# Altium PCB M2FS FLS Data Formatter 8_14_2012 centroid.PcbDoc (part 2 of 3)
Units mil, origin at the board's own origin, x right, y up, seen from the top; angles counter-clockwise.
Board outline 3350 x 3370 mil, 8 copper layers (Top Layer, Internal Plane 1, Mid-Layer 1, Mid-Layer 2, MidLayer3, Mid-Layer 4, Internal Plane 2, Bottom Layer); 141 components, 138 nets, 814 pads, 61 vias.
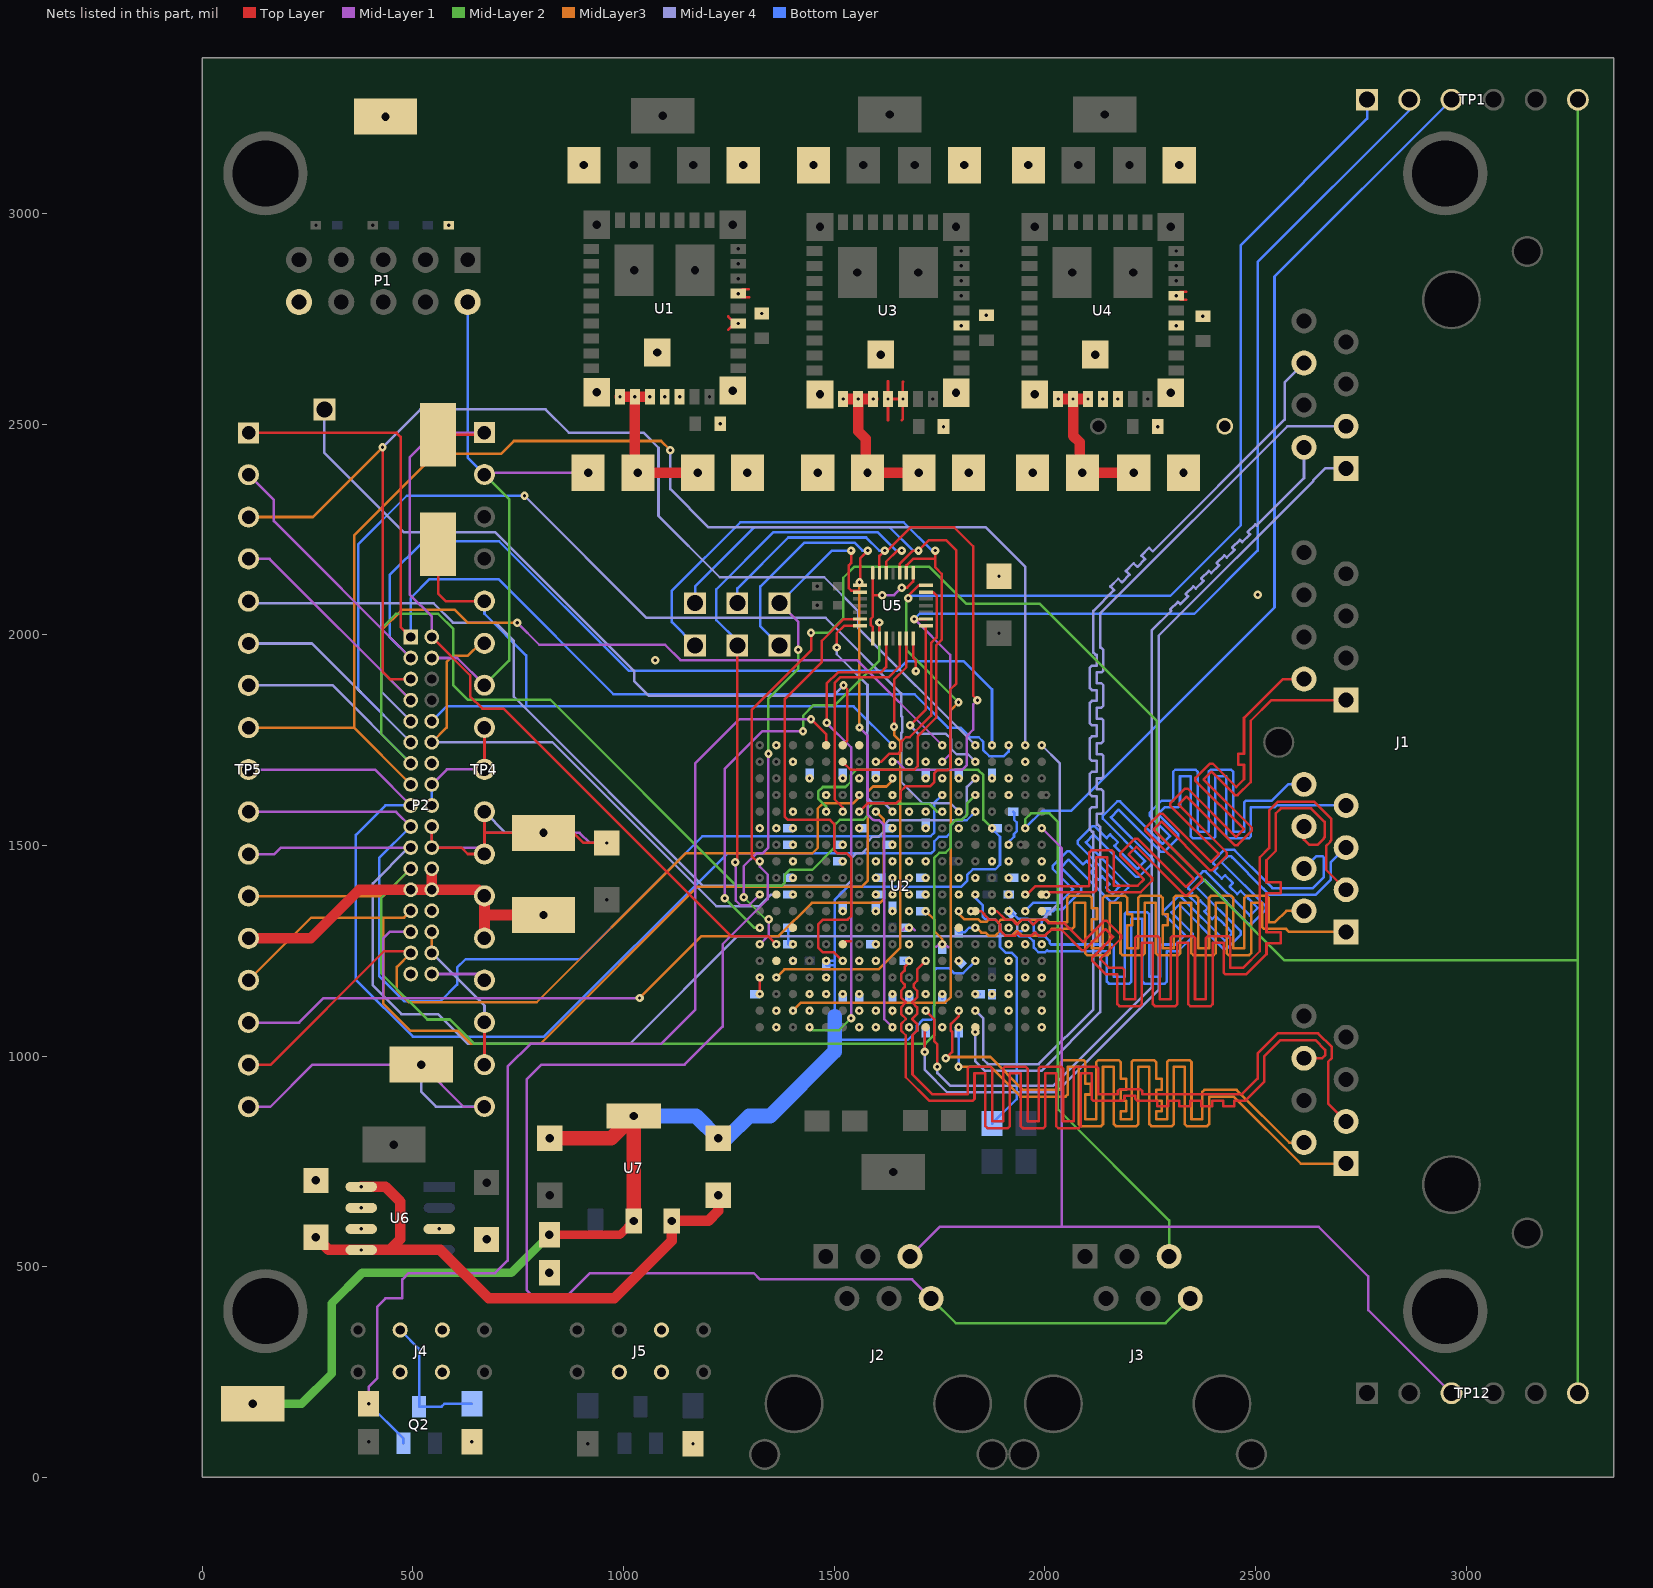
[diagram p8: the nets of this part, all layers, seen from the top]

## Via types
v1: diameter 20, hole 8, Top Layer to Bottom Layer, 60 vias
v2: diameter 20, hole 8, Top Layer to Bottom Layer, tented bottom, 1 vias

## Nets (pads, with @x,y where several pads share a name; then routed paths per layer and width w, separated by ;. In a path a pad name is that pad's centre, name@x,y a point inside that pad or via, vN(x,y) a via of type N, cw(c..) or ccw(c..) an arc to the next point about the centre after c; other vN are vias at no path point) (continued)
5V0: "TEST POINT 10." C7.1 C8.1 C9.1 C10.1 C11.1 C12.1 C59.1 C61.1 J4.2 J5.2 P2.24 P2.25 P2.26 R30.1 R32.1 TP4.12 TP4.13 TP5.13 U1.30 U1.31 U1.32 U3.30 U3.31 U3.32 U4.30 U4.31 U4.32 U6.5 U6.8 U7.1 | length 3446.2
  Top Layer w25: TP5.13@110,1279.61 257.61,1279.61 373,1395 P2.25@495,1395 P2.26@545,1395 ; C61.1@270,570 300,540 U6.5@377.48,540 565,540 680,425 977.55,425 1114.55,562 U7.1@1114.55,608.83 1200.83,608.83 1225,633 C59.1@1225,670 ; U6.8@377.48,690 435,690 470,655 470,565 451,546 ; P2.24@545,1445 P2.26@545,1395 ; TP4.13@670,1280 670,1338 ; 810,1335 673,1335 670,1338 ; U1.30@991.54,2564.8 U1.31@1026.97,2564.8 ; U1.32@1062.4,2564.8 U1.31@1026.97,2564.8 ; C7.1@1175.94,2385 C10.1@1034.06,2385 1026.97,2392.09 U1.31@1026.97,2564.8 ; U3.30@1521.42,2559.69 U3.31@1556.85,2559.69 ; U3.32@1592.28,2559.69 U3.31@1556.85,2559.69 ; C8.1@1700.94,2385 C11.1@1579.06,2385 1575,2389.06 1575,2465 1556.85,2483.15 U3.31@1556.85,2559.69 ; U4.30@2031.42,2559.69 U4.31@2066.85,2559.69 ; U4.32@2102.28,2559.69 U4.31@2066.85,2559.69 ; C9.1@2210.94,2385 C12.1@2089.06,2385 2082.7,2391.36 2082.7,2457 2066.85,2472.85 U4.31@2066.85,2559.69 ; P2.26@545,1395 655.39,1395 TP4.12@670,1380.39 670,1338
  Bottom Layer w25: R32.1@1163.31,81.69 R32.1@1165,80
AGND: "TEST POINT 14.1" C26.2 C48.2 C59.2 C60.2 pad.P5 R27.1 U2.E5 U2.F15 U2.P14 U7.2 | length 4288.6
  Top Layer w20: R27.1@824,576 991.17,576 U7.2@1024,608.83
  Top Layer w35: C60.2@825,805 971,805 U7.2@1024,858 U7.2@1024,608.83
  Mid-Layer 2 w6: U2.E5@1480.83,1580.48 1480.83,1592.98 1461.83,1611.98 1461.83,1627.72 1472.96,1638.85 1526.7,1638.85 1539.2,1651.35 1539.2,1666.4 1552.39,1679.59 1567.44,1679.59 1567.85,1680 1590.67,1680 1591.08,1679.59 1841.67,1679.59 1854.17,1667.09 1854.17,1561.48 U2.F15@1874.54,1541.11
  Mid-Layer 2 w20: 120,175 236,175 307,246 307,413 380,486 734,486 R27.1@824,576
  Bottom Layer w6: 1501.2,1044 1506.2,1039 1674.67,1039 1696.53,1060.86 1696.53,1072.07 1711,1086.54 1730.78,1086.54 1736.06,1091.81 1736.06,1119.18 1737.43,1120.55 1737.43,1203.01 1742.7,1208.28 1773.17,1208.28 1784.22,1197.22 1806.24,1197.22 U2.P14@1835.17,1226.15 ; 1501.2,1095 1501.2,1215.04 ; U2.F15@1874.54,1541.11 1874.54,1539.74 1893.54,1520.74 1893.54,1454.72 1882.18,1443.37 1828.89,1443.37 1816.32,1430.8 1816.32,1416.88 1801.92,1402.47 1801.76,1402.63 1532.72,1402.63 1501.2,1371.12 1501.2,1226 ; 1501.2,1215.04 1501.2,1226 ; 1501.2,1215.04 1500.72,1215.52 C48.2@1480.83,1215.52 pad.P5@1480.83,1226.15 1501.06,1226.15 1501.2,1226
  Bottom Layer w35: U7.2@1024,858 1172,858 C59.2@1225,805 1245,805 1298,858 1348,858 1501.2,1011.2 1501.2,1044 1501.2,1095
CAM_CLKA: "TEST POINT 8.CAM_CLK_A" P2.2 TP4.1 U2.N2 | length 1910.6
  Top Layer w6: P2.2@545,1995 636,1904 636,1854 665,1825 715,1825 1255,1285 1343.24,1285 U2.N2@1362.72,1265.52 ; 560,2475 665.2,2475 TP4.1@670,2479.8
  Mid-Layer 1 w6: P2.2@545,1995 545,2043 493,2095 493,2422 550.8,2479.8 TP4.1@670,2479.8
CAM_D0: P2.23 TP5.12 U2.D14 | length 2706.2
  Mid-Layer 2 w6: P2.23@495,1445 425,1375 425,1196.25 534.25,1087 588,1087 645,1030 1717,1030 1737,1050 1737,1469.81 1749.93,1482.74 1764.3,1482.74 1775.43,1493.87 1775.43,1494.43 1776.8,1495.8 1776.8,1548.98 1787.93,1560.11 1789.11,1560.11 1790.48,1561.48 1803.67,1561.48 1814.8,1572.61 1814.8,1573.8 1816,1575 1816,1600.68 U2.D14@1835.17,1619.85
  MidLayer3 w6: TP5.12@110,1380 430,1380 P2.23@495,1445
CAM_D1: P2.21 TP5.11 U2.A18 | length 2983.5
  Mid-Layer 1 w6: TP5.11@110,1479.41 171.41,1479.41 187,1495 P2.21@495,1495
  Mid-Layer 4 w6: P2.21@495,1495 490,1495 405,1410 405,1168 473,1100 560,1100 630,1030 1016,1030 1271,1285 1895.39,1285 1896.28,1285.89 1921.78,1285.89 1934.28,1298.39 1934.28,1312.76 1945.41,1323.89 1993.89,1323.89 2035,1365 2035,1695.61 U2.A18@1992.65,1737.96
CAM_D2: P2.19 TP5.10 U2.D12 | length 2414.3
  Mid-Layer 1 w6: TP5.10@110,1579.8 460.2,1579.8 P2.19@495,1545
  Bottom Layer w6: P2.19@495,1545 420,1470 420,1190 480,1130 565,1130 605,1170 605,1210 625,1230 895,1230 1187,1522 1729,1522 1737,1530 1737,1600.42 U2.D12@1756.43,1619.85
CAM_D3: P2.17 TP5.9 U2.E14 | length 2693.4
  Mid-Layer 1 w6: TP5.9@110,1680.2 409.8,1680.2 P2.17@495,1595
  Bottom Layer w6: P2.17@495,1595 435,1595 365,1525 365,1181.2 500,1046.2 811.2,1046.2 1246.37,1481.37 1712,1481.37 1712.37,1481.74 1730.78,1481.74 1737.43,1488.38 1737.43,1509.61 1748.56,1520.74 1766.69,1520.74 1776.95,1531 1776.95,1548.91 1787.99,1559.95 1814.64,1559.95 U2.E14@1835.17,1580.48
CAM_D4: P2.15 TP5.8 U2.A17 | length 3183.7
  MidLayer3 w6: TP5.8@110,1779.61 360.39,1779.61 ; P2.15@495,1645 360.39,1779.61 ; v1(1111,2438) 1089,2460 740,2460 710,2430 555,2430 360.39,2235.39 360.39,1779.61
  Mid-Layer 4 w6: v1(1111,2438) 1111,2346 1202,2255 1860,2255 1953.28,2161.72 U2.A17@1953.28,1737.96
CAM_D5: P2.13 TP5.7 U2.E12 | length 2643.2
  Mid-Layer 2 w6: P2.13@495,1695 425,1765 425,2015 460,2050 560,2050 596,2014 596,1880 630,1846 826,1846 1268,1404 1374.5,1404 1383.09,1412.59 1383.09,1430.87 1394.22,1442 1447.87,1442 1499.83,1493.96 1499.83,1547.61 1513.22,1561 1569,1561 1579.95,1571.95 1579.95,1588.35 1591.08,1599.48 1724.93,1599.48 1743.93,1580.48 U2.E12@1756.43,1580.48
  Mid-Layer 4 w6: TP5.7@110,1880 310,1880 P2.13@495,1695
CAM_D6: P2.11 TP5.6 U2.E13 | length 2912.4
  Mid-Layer 4 w6: TP5.6@110,1979.41 260.59,1979.41 P2.11@495,1745 ; v1(765,2330) 1055,2040 1480,2040 1659,1861 1659,1807 1661,1805 1661,1769 1658.69,1766.69 1658.69,1651.35 1709.76,1600.28 1776,1600.28 U2.E13@1795.8,1580.48
  Bottom Layer w6: P2.11@495,1745 370,1870 370,2214.5 485.5,2330 v1(765,2330)
CAM_D7: P2.9 TP5.5 U2.C14 | length 2584.5
  Mid-Layer 4 w6: TP5.5@110,2079.8 114.8,2075 425,2075 ; P2.9@495,1795 425,1865 425,2075 ; U2.C14@1835.17,1659.22 1814.8,1638.85 1814.8,1572.61 1802.3,1560.11 1630.45,1560.11 1619.32,1548.98 1619.32,1534.61 1605.45,1520.74 1591.08,1520.74 1579.95,1509.61 1579.95,1495.24 1566.07,1481.37 1551.7,1481.37 1540.57,1470.24 1540.57,1416.5 1528.07,1404 1188.97,1404 740,1852.97 740,1985.38 696.38,2029 595,2029 549,2075 425,2075
CAM_D8: P2.7 TP5.4 U2.A12 | length 2203.4
  Mid-Layer 1 w6: TP5.4@110,2180.2 159.8,2180.2 P2.7@495,1845 ; v1(747.44,2029) 800,1976.44 1098.56,1976.44 1135,1940 1554.39,1940 U2.A12@1756.43,1737.96
  MidLayer3 w6: P2.7@495,1845 425,1915 425,2010 475,2060 599,2060 630,2029 v1(747.44,2029)
CAM_D9: P2.5 TP5.3 U2.A14 | length 2886.1
  Top Layer w6: v1(428,2445) 428,1912.5 445.5,1895 P2.5@495,1895
  MidLayer3 w6: TP5.3@110,2279.61 262.61,2279.61 v1(428,2445)
  Mid-Layer 4 w6: v1(428,2445) 518,2535 815,2535 870,2480 1047,2480 1083,2444 1083,2282 1228.44,2136.56 1476.44,2136.56 1556.56,2056.44 1556.56,2016.56 U2.A14@1835.17,1737.96
CAM_D10: P2.3 TP5.2 U2.A15 | length 2571.2
  Mid-Layer 1 w6: TP5.2@110,2380 170,2320 170,2270 P2.3@495,1945
  Bottom Layer w6: P2.3@495,1945 445,1995 445,2142 525,2222 705,2222 1012,1915 1650,1915 1672,1937 1808,1937 1874.54,1870.46 U2.A15@1874.54,1737.96
CAM_D11: P2.1 TP5.1 U2.A16 | length 2584.6
  Top Layer w6: TP5.1@110,2479.41 461.59,2479.41 471,2470 471,2019 P2.1@495,1995
  Bottom Layer w6: P2.1@495,1995 495,2087 540,2132 703,2132 976,1859 1691,1859 1770,1780 1800,1780 1823.04,1756.96 1843.04,1756.96 1854.17,1745.83 1854.17,1725.83 1868,1712 1902.91,1712 1913.91,1723 U2.A16@1913.91,1737.96
CAM_DIGITAL: P2.30 P2.32 TP4.15 TP4.16 | length 367
  Top Layer w6: TP4.16@670,979.8 TP4.15@670,1080.2
  MidLayer3 w6: P2.32@545,1245 P2.30@545,1295
  Mid-Layer 4 w6: P2.32@545,1245 670,1120 TP4.15@670,1080.2
CAM_FLD: "TEST POINT 5.TEST POINT 9" P2.10 TP4.5 U2.A9 | length 1671.5
  Top Layer w6: 560,2215 560,2098 577.8,2080.2 TP4.5@670,2080.2
  Bottom Layer w6: P2.10@545,1795 580,1830 769,1830 ; TP4.5@670,2080.2 670,2050 769,1951 769,1830 ; U2.A9@1638.32,1737.96 1546.28,1830 769,1830
CAM_FLD_OUT: U2.E10
CAM_HS: P2.29 TP5.15 U2.E8 | length 2058
  Mid-Layer 1 w6: TP5.15@110,1079.8 229.8,1079.8 288,1138 430,1138 ; P2.29@495,1295 445,1295 430,1280 430,1138 ; v1(1038,1138) 430,1138
  MidLayer3 w6: v1(1038,1138) 1185,1285 1368,1285 1447,1364 1609,1364 1618,1373 1618,1561.43 U2.E8@1598.95,1580.48
CAM_IO: P2.16 P2.18 TP4.8 TP4.9 | length 289.2
  Top Layer w6: TP4.9@670,1680.59 TP4.8@670,1780
  Mid-Layer 1 w6: P2.16@545,1645 580.59,1680.59 TP4.9@670,1680.59
  Bottom Layer w6: P2.18@545,1595 P2.16@545,1645
CAM_PCLK: P2.27 TP5.14 U2.C9 | length 2294.4
  MidLayer3 w6: TP5.14@110,1180.2 258.8,1329 432,1329 ; P2.27@495,1345 479,1329 432,1329 ; U2.C9@1638.32,1659.22 1638.32,1654.32 1624,1640 1592.17,1640 1579.95,1627.77 1579.95,1416.5 1566.07,1402.63 1176,1402.63 802.37,1029 638,1029 607,1060 494,1060 430,1124 430,1327 432,1329
CAM_VS: P2.31 TP5.16 U2.D7 | length 1971.5
  Top Layer w6: TP5.16@110,979.41 162.41,979.41 432,1249 491,1249 P2.31@495,1245
  MidLayer3 w6: P2.31@495,1245 462,1212 462,1156 490,1128 794,1128 1147.37,1481.37 1447.96,1481.37 1461,1494.41 1461,1587.52 1472.96,1599.48 1474.48,1599.48 1475,1600 1545,1600 1559.57,1614.57 U2.D7@1559.57,1619.85
CMOS_OE: P2.12 TP4.6 U2.K2 | length 1303.4
  MidLayer3 w6: P2.12@545,1745 580,1780 580,1935 594.8,1949.8 630,1949.8 660,1979.8 TP4.6@670,1979.8
  Mid-Layer 4 w6: P2.12@545,1745 831,1745 1220,1356 1322.59,1356 1350.22,1383.63 U2.K2@1362.72,1383.63
CONF_DONE: R26.1 U2.K14 | length 629.4
  Bottom Layer w6: U2.K14@1835.17,1383.63 1835.17,1375.86 1853.04,1357.99 1853.04,1330.53 1858.31,1325.26 1881.04,1325.26 1893.54,1312.76 1893.54,1259.24 1907.79,1244.99 1921.71,1244.99 1932.75,1233.95 1932.75,897.75 R26.1@1875,840
DATA_CLK_OUT_A_N: J1.A3 U2.P11 | length 2534.6
  Top Layer w6: U2.P11@1717.06,1226.15 1696.69,1205.78 1696.69,1178.91 1688.32,1170.55 1688.32,1163.64 1696.69,1155.28 1696.69,1139.54 1685.69,1128.54 1685.69,1126.91 1696.69,1115.91 1696.69,1100.17 1685.84,1089.33 1685.84,1087.38 1696.69,1076.54 1696.69,1060.8 1685.84,1049.96 1685.84,956.63 1732.47,910 1817,910 1817,970.31 1821.69,975 1870.31,975 1875,970.31 1875,845 1901,845 1901,970.31 1905.69,975 1954.31,975 1959,970.31 1959,845 1985,845 1985,970.31 1989.69,975 2038.31,975 2043,970.31 2043,845 2069,845 2069,970.31 2073.69,975 2122.31,975 2127,970.31 2127,910 2173,910 2173,917.31 2177.69,922 2226.31,922 2231,917.31 2231,910 2468.37,910 2505,946.63 2505,1006.63 2552.37,1054 2648.63,1054 2681,1021.63 2681,995.37 2672.31,986.69 2672.31,887.68 J1.A3@2715,845
DATA_CLK_OUT_A_P: J1.A6 R21.2 U2.P10 | length 2523.7
  Top Layer w6: U2.P10@1677.69,1226.15 1677.69,1222.63 1667.06,1212 1667.06,1203.02 1658.69,1194.65 1658.69,1178.91 1667.05,1170.55 1667.05,1163.64 1658.69,1155.28 1658.69,1139.54 1669.69,1128.54 1669.69,1126.91 1658.69,1115.91 1658.69,1100.17 1669.82,1089.04 1669.82,1087.67 1658.69,1076.54 1658.69,1060.8 1669.84,1049.64 1669.84,950 1725.84,894 1828.31,894 1833,898.69 1833,959 1859,959 1859,833.69 1863.69,829 1912.31,829 1917,833.69 1917,959 1943,959 1943,833.69 1947.69,829 1996.31,829 2001,833.69 2001,959 2027,959 2027,833.69 2031.69,829 2080.31,829 2085,833.69 2085,959 2111,959 2111,898.69 2115.69,894 2184.31,894 2189,898.69 2189,906 2215,906 2215,898.69 2219.69,894 2267,894 2267,881 2293,881 2293,894 2319,894 2319,881 2345,881 2345,894 2371,894 2371,881 2397,881 2397,894 2423,894 2423,881 2449,881 2449,894 2475,894 2521,940 2521,1000 2559,1038 2642,1038 2665,1015 2665,1002 2658,995 J1.A6@2615,995
  Bottom Layer w6: R21.2@1667.06,1226.15 U2.P10@1677.69,1226.15
DATA_CLK_OUT_B_N: J1.D3 R23.1 U2.V14 | length 2287.8
  Top Layer w6: R23.1@1835.17,1057.31 U2.V14@1835.17,1068.67
  Mid-Layer 4 w6: R23.1@1835.17,1057.31 1835.17,987.83 1858,965 1991.63,965 2131,1104.37 2131,1544.31 2126.31,1549 2123,1549 2123,1575 2134.31,1575 2139,1579.69 2139,1628.31 2134.31,1633 2123,1633 2123,1659 2134.31,1659 2139,1663.69 2139,1712.31 2134.31,1717 2123,1717 2123,1743 2134.31,1743 2139,1747.69 2139,1796.31 2134.31,1801 2123,1801 2123,1827 2134.31,1827 2139,1831.69 2139,1880.31 2134.31,1885 2123,1885 2123,1911 2134.31,1911 2139,1915.69 2139,1964.31 2134.31,1969 2131,1969 2131,2050.37 2575.63,2495 J1.D3@2715,2495
DATA_CLK_OUT_B_P: J1.D6 U2.U14 | length 2386.4
  Mid-Layer 4 w6: U2.U14@1835.17,1108.04 1854.17,1089.04 1854.17,1041.09 1854.1,1041.02 1854.1,991.53 1864.63,981 1985,981 2115,1111 2115,1533 2111.69,1533 2107,1537.69 2107,1586.31 2111.69,1591 2123,1591 2123,1617 2111.69,1617 2107,1621.69 2107,1670.31 2111.69,1675 2123,1675 2123,1701 2111.69,1701 2107,1705.69 2107,1754.31 2111.69,1759 2123,1759 2123,1785 2111.69,1785 2107,1789.69 2107,1838.31 2111.69,1843 2123,1843 2123,1869 2111.69,1869 2107,1873.69 2107,1922.31 2111.69,1927 2123,1927 2123,1953 2119.69,1953 2115,1957.69 2115,2057 2164.19,2106.19 2155.71,2114.68 2174.09,2133.06 2182.58,2124.58 2200.96,2142.96 2192.48,2151.45 2210.86,2169.83 2219.35,2161.35 2237.73,2179.73 2229.25,2188.22 2247.63,2206.6 2256.12,2198.12 2565,2507 2569,2511 2569,2599 J1.D6@2615,2645
DATA_CLK_OUTA: U2.U8
DATA_CLK_OUTB: U2.V8
DATA_READY: U2.H16
DTP: J2.6 J3.6 TP1.6 TP12.6 U2.H1 | length 9312.1
  Top Layer w6: U2.H1@1323.35,1462.37 1323.35,1460.35 1318.65,1460.35 1304,1475 1304,1822 1445,1963 v1(1445,2005)
  Mid-Layer 1 w6: U2.H1@1323.35,1462.37 1323.35,1449.87 1342.35,1430.87 1342.35,1373 1235,1265.65 1235,1070 1145,980 805,980 770,945 770,445 790,425 860,425 920,485 1309,485 1324,470 1685,470 J2.6@1730,425
  Mid-Layer 2 w6: v1(1445,2005) 1487,2005 1521.5,2039.5 1521.5,2135.5 1548,2162 1725,2162 1813,2074 1987,2074 2266,1795 2266,1530 2568,1228 3265,1228 ; J2.6@1730,425 1788.48,366.52 2286.52,366.52 J3.6@2345,425 ; TP12.6@3265,200 3265,1228 ; TP1.6@3265,3270 3265,1228
EOS_A: J2.5 TP12.3 U2.F18 | length 2490.2
  Mid-Layer 1 w6: J2.5@1680,525 1750,595 2040,595 ; U2.F18@1992.65,1541.11 2040,1493.76 2040,595 ; TP12.3@2965,200 2767.5,397.5 2767.5,477.5 2650,595 2040,595
EOS_B: J3.5 TP1.3 U2.F17 | length 3440.9
  Mid-Layer 2 w6: U2.F17@1953.28,1541.11 1953.28,1562.28 1967,1576 2011,1576 2031,1556 2031,874 2295,610 J3.5@2295,525
  Bottom Layer w6: U2.F17@1953.28,1541.11 1995,1582.83 2062.83,1582.83 2545,2065 2545,2850 TP1.3@2965,3270
EOSA: U2.D16
EOSB: U2.C16
FRAME_CLK_OUT_A_N: J1.A1 R22.1 U2.V13 | length 2207.8
  MidLayer3 w6: v1(1795,975) 1871,975 1941.81,904.19 2049.31,904.19 2054,908.87 2054,974.39 2080,974.39 2080,838.67 2084.69,833.99 2133.31,833.99 2138,838.67 2138,974.39 2164,974.39 2164,838.67 2168.69,833.99 2217.31,833.99 2222,838.67 2222,974.39 2248,974.39 2248,838.67 2252.69,833.99 2301.31,833.99 2306,838.67 2306,974.39 2332,974.39 2332,838.67 2336.69,833.99 2385.31,833.99 2390,838.67 2390,904.19 2448.19,904.19 2607.37,745 J1.A1@2715,745
  Bottom Layer w6: v1(1795,975) 1795.8,975.8 R22.1@1795.8,1057.31 U2.V13@1795.8,1068.67
FRAME_CLK_OUT_A_P: J1.A2 U2.U13 | length 2295.1
  Top Layer w6: v1(1765,995) 1779.8,1009.8 1779.8,1057.8 1776.8,1060.8 1776.8,1076.54 1795.8,1095.54 U2.U13@1795.8,1108.04
  MidLayer3 w6: v1(1765,995) 1768,998 1870.63,998 1948.44,920.19 2038,920.19 2038,985.7 2042.69,990.39 2091.31,990.39 2096,985.7 2096,935 2109.3,935 2109.3,909 2096,909 2096,849.99 2122,849.99 2122,985.7 2126.69,990.39 2175.31,990.39 2180,985.7 2180,946.7 2193.3,946.7 2193.3,920.7 2180,920.7 2180,894.7 2193.3,894.7 2193.3,868.7 2180,868.7 2180,849.99 2206,849.99 2206,985.7 2210.69,990.39 2259.31,990.39 2264,985.7 2264,946.7 2277.3,946.7 2277.3,920.7 2264,920.7 2264,894.7 2277.3,894.7 2277.3,868.7 2264,868.7 2264,849.99 2290,849.99 2290,985.7 2294.69,990.39 2343.31,990.39 2348,985.7 2348,849.99 2374,849.99 2374,915.5 2378.69,920.19 2454.81,920.19 2580,795 J1.A2@2615,795
FRAME_CLK_OUT_B_N: J1.D1 R24.1 U2.V11 | length 2279.4
  Top Layer w6: v1(1715,1010) 1715,1066.61 U2.V11@1717.06,1068.67
  Mid-Layer 4 w6: v1(1715,1010) 1715,967.37 1768.37,914 2026.63,914 2270,1157.37 2270,1997.75 2637.19,2364.93 2637.19,2367.19 2665,2395 J1.D1@2715,2395
  Bottom Layer w6: v1(1715,1010) 1715,1055.31 R24.1@1717,1057.31
FRAME_CLK_OUT_B_P: J1.D2 U2.U11 | length 2296.5
  Top Layer w6: U2.U11@1717.06,1108.04 1737,1088.09 1737,1035.55 1745,1027.55 v1(1745,975)
  Mid-Layer 4 w6: v1(1745,975) 1745,960 1775,930 2020,930 2254,1164 2254,2011 2300.19,2057.19 2297.36,2060.02 2315.75,2078.41 2318.58,2075.58 2321.41,2072.75 2339.79,2091.13 2334.13,2096.79 2352.52,2115.18 2358.18,2109.52 2376.56,2127.9 2370.9,2133.56 2389.29,2151.94 2394.94,2146.29 2413.33,2164.67 2410.5,2167.5 2407.67,2170.33 2426.06,2188.71 2431.71,2183.06 2450.1,2201.44 2444.44,2207.1 2462.83,2225.48 2465.66,2222.66 2468.48,2219.83 2486.87,2238.21 2481.21,2243.87 2499.6,2262.25 2502.42,2259.42 2615,2372 J1.D2@2615,2445
FRAME_CLK_OUTA: U2.V7
FRAME_CLK_OUTB: U2.U7
GND: "TEST POINT 7." "TEST POINT 9." "TEST POINT 12.1" C1.2 C2.2 C3.2 C4.2 C5.2 C6.2 C7.2 C8.2 C9.2 C10.2 C11.2 C12.2 C13.1 C14.2 C15.2 C16.1 C17.2 C18.1 C19.2 C20.1 C21.2 C22.1 C23.1 C24.2 C25.2 C27.2 C28.1 C29.2 C30.1 C31.1 C32.1 C33.1 C34.2 C35.2 C36.2 C37.1 C38.2 C39.2 C40.1 C41.2 C42.2 C43.2 C44.2 C45.1 C46.2 C47.2 C49.2 C50.2 C51.1 C52.2 C53.2 C54.2 C55.2 C56.2 C57.2 C58.1 C61.2 C62.2 J4.3 J4.7 J5.3 J5.7 P1.2 P1.10 P2.4 P2.14 P2.20 P2.22 P2.28 P2.33 P2.34 R1.2 R2.2 R3.2 R4.2 R5.1 R6.2 R7.2 R10.1 R27.2 TP4.2 TP4.7 TP4.10 TP4.11 TP4.14 TP4.17 TP5.17 U1.1 U1.5 U1.7 U1.29 U1.33 U1.34 U1.37 U2.A2 U2.B10 U2.B17 U2.C4 U2.C6 U2.C8 U2.C11 U2.C12 U2.C13 U2.C15 U2.E3 U2.E11 U2.F1 U2.F2 U2.F3 U2.F7 U2.F9 U2.F11 U2.F13 U2.G3 U2.G6 U2.G9 U2.G16 U2.H3 U2.H6 U2.H8 U2.H9 U2.H10 U2.H11 U2.H15 U2.H18 U2.J3 U2.J8 U2.J9 U2.J10 U2.J11 U2.J13 U2.J14 U2.J16 U2.J17 U2.J18 U2.K3 U2.K8 U2.K9 U2.K10 U2.K11 U2.K13 U2.K16 U2.L6 U2.L8 U2.L9 U2.L10 U2.L11 U2.L18 U2.M10 U2.M13 U2.M16 U2.N3 U2.N6 U2.N8 U2.N10 U2.N12 U2.N16 U2.N17 U2.N18 U2.P3 U2.P8 U2.P13 U2.P16 U2.R1 U2.R5 U2.R16 U2.R17 U2.R18 U2.T1 U2.T5 U2.T6 U2.T7 U2.T9 U2.T10 U2.T11 U2.T12 U2.T14 U2.T15 U2.T16 U2.U2 U2.U9 U2.U10 U2.U16 U2.U18 U2.V2 U2.V10 U2.V12 U2.V18 U3.1 U3.5 U3.29 U3.33 U3.34 U3.37 U4.1 U4.5 U4.7 U4.29 U4.33 U4.34 U4.37 U5.1 U5.7 U5.15 U5.21 U6.3 U6.6 U6.7 | length 4952.6
  Top Layer w6: P2.20@545,1545 P2.22@545,1495 615,1495 630.2,1479.8 TP4.11@670,1479.8 670,1530 ; TP4.10@670,1580.2 670,1530 ; C22.1@960,1506 905,1506 881,1530 810,1530 670,1530 ; 1248.35,2723.93 1263.43,2739.02 U1.5@1265.16,2739.02 ; 1248.35,2755.83 U1.5@1265.16,2739.02 ; U1.5@1272.05,2739.02 U1.5@1265.16,2739.02 ; 1297,2820 1282.17,2820 U1.7@1272.05,2809.88 1280.93,2801 1298,2801 ; U2.T1@1323.35,1143.35 U2.T1@1323.35,1147.41 ; U2.R1@1323.35,1186.78 U2.T1@1323.35,1147.41 ; U2.T1@1325.41,1147.41 U2.T1@1323.35,1147.41 ; U2.V2@1359.33,1068.67 U2.V2@1362.72,1068.67 U2.V2@1367.67,1068.67 ; U2.N6@1520.2,1265.52 1527.69,1273 1539,1273 ; U5.21@1591.43,1991.41 1591.43,2018.57 1587,2023 1587,2038 1591.43,2042.43 1591.43,2094 ; U5.1@1591.43,2147.41 1591.43,2094 ; v1(1614,2094) 1591.43,2094 ; 1627,2602 1627.72,2601.28 U3.33@1627.72,2559.69 ; 1628,2509 1627.72,2509.28 U3.33@1627.72,2559.69 ; v1(1660,2112) 1673,2112 1687.43,2126.43 U5.7@1687.43,2147.41 ; 1660,2509 1663.15,2512.15 U3.34@1663.15,2559.69 ; 1664,2601 1663.15,2600.15 U3.34@1663.15,2559.69 ; U5.15@1687.43,1991.41 1687.43,1945.57 1694,1939 v1(1694,1914) ; U2.U18@1988.02,1108.04 U2.U18@1992.65,1108.04 U2.U18@1992.65,1113.65 ; U2.L18@1992.65,1344.26 U2.L18@1998.74,1344.26 ; 2335.63,2795 2321.69,2795 U4.7@2311.93,2804.76 2321.62,2814.45 2335.63,2814.45 ; U3.33@1627.72,2559.69 U3.34@1663.15,2559.69
  Mid-Layer 1 w6: TP5.17@110,880 162,880 262,980 520,980 619.61,880.39 TP4.17@670,880.39 ; P2.34@545,1195 655.59,1195 TP4.14@670,1180.59 ; P2.20@545,1545 P2.22@545,1495 TP4.11@670,1495 ; P2.4@545,1945 605.39,1945 TP4.7@670,1880.39 ; TP4.11@670,1479.8 TP4.11@670,1495 ; TP4.10@670,1580.2 670,1529 ; TP4.2@670,2380.39 674.61,2385 C10.2@915.94,2385 ; C22.1@960,1506 920,1506 896,1530 810,1530 671,1530 670,1529 ; v1(1614,2094) 1642,2094 v1(1660,2112) ; 1663.56,1299.04 1669.41,1304.89 U2.M10@1677.69,1304.89 1684.9,1304.89 1691.39,1298.4 ; 1742.3,1259.67 1748.15,1265.52 U2.N12@1756.43,1265.52 1763.64,1265.52 1770.13,1259.03 ; TP4.11@670,1495 670,1529
  Mid-Layer 2 w6: TP4.7@670,1880.39 728.44,1938.83 728.44,2321.96 TP4.2@670,2380.39
  MidLayer3 w6: U2.R1@1323.35,1186.78 U2.R1@1328.16,1186.78 ; U2.V2@1362.72,1068.67 U2.V2@1367.53,1068.67 ; U2.U2@1362.72,1101.13 U2.U2@1362.72,1108.04 U2.U2@1363.04,1108.04 ; U2.N3@1397.28,1265.52 U2.N3@1402.09,1265.52 U2.N3@1402.09,1268.09 ; U2.G6@1520.2,1495.16 U2.G6@1520.2,1501.74 ; U2.C8@1598.95,1659.22 U2.C8@1601.22,1659.22 ; U2.U9@1638.32,1099.32 U2.U9@1638.32,1108.04 ; U2.V10@1672.88,1068.67 U2.V10@1677.69,1068.67 ; U2.T11@1710.15,1147.41 U2.T11@1717.06,1147.41 ; U2.L11@1717.06,1344.26 1737.43,1323.89 1737.43,1297.02 1756.43,1278.02 U2.N12@1756.43,1265.52 ; U2.P13@1795.8,1228.8 U2.P13@1795.8,1226.15 U2.P13@1800.61,1226.15 ; U2.C15@1867.78,1659.22 U2.C15@1874.54,1659.22 ; U2.T15@1874.54,1147.41 U2.T15@1874.54,1151.46 ; U2.R16@1913.91,1186.78 U2.R16@1914.22,1186.78 ; U2.B17@1953.28,1698.59 U2.B17@1953.28,1700.22 ; U2.V18@1992.65,1068.67 U2.V18@1992.65,1073.4 ; U2.U18@1992.65,1108.04 U2.U18@1992.65,1111.65
  Mid-Layer 4 w6: 520,980 520,915 554.61,880.39 TP4.17@670,880.39 ; TP4.10@670,1580.2 720.2,1530 810,1530
  Bottom Layer w6: P1.2@630,2790 630,2420.39 TP4.2@670,2380.39 ; C47.2@1391.46,1265.52 C43.2@1391.46,1304.89 ; C53.2@1677.69,1136.78 U2.T10@1677.69,1147.41 ; C52.2@1756.43,1136.78 U2.T12@1756.43,1147.41 ; U2.T14@1835.17,1147.41 C58.1@1845.8,1147.41 ; U2.G16@1913.91,1501.74 1913.91,1508.23 1926.42,1520.74 1926.74,1520.74 1926.74,1527.07 1932.91,1533.24 1932.91,1555.15 1927,1561.05 1927,1578.02 C20.1@1924.54,1580.48
  other v1: 1075,1940 2505,2095
Hs: U2.A7
Hsyn: J4.6 Q2.3 R30.2 | length 328.1
  Bottom Layer w6: J4.6@470,350 515,305 Q2.3@515,168.31 568.31,168.31 575,175 R30.2@640,175
Hsync: Q2.2 R31.2 U2.A5 | length 2689
  Top Layer w6: v1(1445,1800) 1480.83,1764.17 U2.A5@1480.83,1737.96
  Mid-Layer 1 w6: R31.2@395,175 395,215 415,235 415,405 435,425 475,425 475,470 490,485 695,485 725,515 725,975 780,1030 1090,1030 1170,1110 1170,1695 1275,1800 v1(1445,1800)
  Bottom Layer w6: R31.2@395,175 477.6,92.4 Q2.2@477.6,81.69
IO1: TP8.1 U2.N1 U5.27 | length 1273.6
  Top Layer w6: v1(1540,2200) 1540,2170 1535,2165 1535,2110.61 1541.2,2104.41 1558.43,2104.41 U5.27@1561.43,2101.41
  Mid-Layer 1 w6: v1(1285.35,1377.12) 1285.35,1451.24 1315.48,1481.37 1329.85,1481.37 1343.72,1495.24 1343.72,1717.28 v2@1343,1718 ; U2.N1@1323.35,1265.52 1345,1287.16 v1(1345,1325) ; TP8.1@1370,2075 1415,2030 v1(1415,1965)
  Mid-Layer 2 w6: v1(1285.35,1377.12) 1337.48,1325 v1(1345,1325) ; v2@1343,1718 v2@1343.72,1718.72 ; v2@1343.72,1717.51 v2@1343.72,1718.72 ; v1(1415,1965) 1415,1920 1343.72,1848.72 v2@1343.72,1718.72
  Bottom Layer w6: TP8.1@1370,2075 1495,2200 v1(1540,2200)
  other v2: 1344,1718
IO2: TP11.1 U2.V9 U5.28 | length 1660.2
  Top Layer w6: v1(1560,2125) 1560,2118.83 U5.28@1561.43,2117.41 1561.43,2181.43 v1(1580,2200)
  Mid-Layer 1 w6: v1(1560,1780) 1579,1761 1579,1607 1579.95,1606.05 1579.95,1572.61 1591.08,1561.48 1593.63,1561.48 1595,1560.11 1606.82,1560.11 1617.95,1548.98 1617.95,1546.37 1619.32,1545 1619.32,1087.67 U2.V9@1638.32,1068.67
  MidLayer3 w6: v1(1560,1780) v1(1560,2125)
  Bottom Layer w6: TP11.1@1370,1975 1325,2020 1325,2115 1429,2219 1547.87,2219 1566.87,2200 v1(1580,2200)
IO3: TP7.1 U2.B9 U5.2 | length 1480
  Top Layer w6: U5.2@1607.43,2147.41 1607.43,2187.43 v1(1620,2200) 1626.51,2200 1681.51,2255 1785,2255 1830,2210 1830,1855 v1(1840,1845)
  Mid-Layer 1 w6: U2.B9@1638.32,1698.59 1650.82,1698.59 1669.82,1679.59 1803.67,1679.59 1814.8,1690.72 1814.8,1759.8 1830,1775 1830,1835 v1(1840,1845)
  Bottom Layer w6: TP7.1@1270,2075 1270,2110 1391,2231 1575.87,2231 1606.87,2200 v1(1620,2200)
IO4: TP10.1 U2.K1 U5.3 | length 1421.8
  Top Layer w6: v1(1265,1460) 1270,1465 TP10.1@1270,1975 ; U5.3@1623.43,2147.41 1623.43,2173.43 1650,2200 v1(1660,2200)
  Mid-Layer 1 w6: v1(1265,1460) 1266.35,1458.65 1266.35,1369.25 1277.48,1358.12 1298.12,1358.12 1323.35,1383.35 U2.K1@1323.35,1383.63
  Bottom Layer w6: TP10.1@1270,1975 1270,1985 1220,2035 1220,2108.03 1354.97,2243 1603.87,2243 1646.87,2200 v1(1660,2200)
IO5: TP6.1 U2.E7 U5.5 | length 1633.4
  Top Layer w6: U2.E7@1559.57,1580.48 1579.09,1600 1647,1600 1658,1611 1658,1628.72 1669.66,1640.38 1669.82,1640.22 1727.22,1640.22 1737,1650 1737,1671 1745,1679 1770,1679 1775.43,1684.43 1775.43,1870 1790,1884.57 1790,2200 1765,2225 1725,2225 v1(1700,2200) ; U5.5@1655.43,2147.41 1655.43,2168.56 1686.87,2200 1689.82,2200
  Bottom Layer w6: TP6.1@1170,2075 1170,2115 1310,2255 1631.87,2255 1686.87,2200 v1(1700,2200)
IO6: TP9.1 U2.B6 U5.6 | length 1696.6
  Top Layer w6: U2.B6@1520.2,1698.59 1539.2,1679.59 1689.59,1679.59 1698,1688 1698,1759.16 1742,1803.16 1742,1975 1754.93,1987.93 1754.93,2144.93 1755,2145 1740,2160 1740,2180 ; U5.6@1671.43,2147.41 1671.43,2164.64 1687.79,2181 1739,2181 1740,2180 ; v1(1740,2200) 1740,2180
  Bottom Layer w6: TP9.1@1170,1975 1115,2030 1115,2105 1277,2267 1665,2267 1732,2200 v1(1740,2200)
IO7: TP1.1 U2.U3 U5.8 | length 3457.6
  Top Layer w6: U2.U3@1402.09,1108.04 1403,1107.13 U2.U3@1403,1102.09 ; v1(1676,2087) 1676,2093.21 1700.2,2117.41 U5.8@1717.43,2117.41
  Mid-Layer 2 w6: v1(1676,2087) 1671.3,2082.3 1671.3,1963.7 v1(1795,1840)
  MidLayer3 w6: U2.U3@1402.09,1108.04 1421.09,1127.04 1762.93,1127.04 1776.8,1140.91 1776.8,1821.8 v1(1795,1840) ; U2.U3@1403,1102.09 U2.U3@1405.52,1104.61
  Bottom Layer w6: v1(1676,2087) 1681.5,2092.5 2297.5,2092.5 2465,2260 2465,2925 2765,3225 TP1.1@2765,3270
IO8: U2.B8 U5.9 | length 507.9
  Top Layer w6: U2.B8@1598.95,1698.59 1611.45,1698.59 1630.45,1717.59 1651.28,1717.59 1658.69,1725 1658.69,1745.83 1669.82,1756.96 1678.83,1756.96 1730,1808.13 1730,1980.57 1742.93,1993.5 1742.93,2093.14 1734.65,2101.41 U5.9@1717.43,2101.41
IO9: TP1.2 U2.B12 U5.13 | length 2510.3
  Top Layer w6: v1(1690.3,2037.41) U5.13@1717.43,2037.41
  Mid-Layer 1 w6: v1(1690.3,2037.41) 1775.43,1952.28 1775.43,1717.59 U2.B12@1756.43,1698.59
  Bottom Layer w6: v1(1690.3,2037.41) 1702.89,2050 2355,2050 2505,2200 2505,2885 2865,3245 TP1.2@2865,3270
IO10: U2.B14 U5.14 | length 460
  Top Layer w6: v1(1680,1785) 1717.43,1822.43 U5.14@1717.43,2021.41 ; U2.B14@1831.41,1698.59 U2.B14@1835.17,1698.59
  Mid-Layer 4 w6: v1(1680,1785) 1700,1765 1765,1765 1777.8,1752.2 1777.8,1729.3 1790.51,1716.59 1817.17,1716.59 U2.B14@1835.17,1698.59
IO11: U2.R2 U5.16 | length 1079.7
  Top Layer w6: U2.R2@1360,1185 1361.78,1186.78 U2.R2@1362.72,1186.78 ; v1(1642,1782) 1642,1893.57 1671.43,1923 U5.16@1671.43,1991.41
  MidLayer3 w6: U2.R2@1362.72,1186.78 1381.72,1205.78 1605.45,1205.78 1657.32,1257.65 1657.32,1746.76 1642,1762.07 v1(1642,1782)
IO12: U2.E6 U5.17 | length 550
  Top Layer w6: U2.E6@1520.2,1580.48 1520.2,1590.8 1501.2,1609.8 1501.2,1886.07 1514.13,1899 1629,1899 1655.43,1925.43 U5.17@1655.43,1991.41
IO13: U2.V4 U5.19 | length 1159.3
  Top Layer w6: U2.V4@1441.46,1068.67 U2.V4@1444.37,1068.67 ; v1(1482.2,1790.9) 1482.2,1884.04 1509.16,1911 1611,1911 1623.43,1923.43 U5.19@1623.43,1991.41
  Mid-Layer 1 w6: v1(1482.2,1790.9) 1540,1733.1 v1(1540,1090)
  Mid-Layer 2 w6: U2.V4@1441.46,1068.67 1448.09,1062.04 1512.04,1062.04 v1(1540,1090)
IO14: U2.M1 U5.20 | length 1044.4
  Top Layer w6: U2.M1@1323.35,1304.89 1324.89,1304.89 U2.M1@1325,1305 ; U5.20@1607.43,1991.41 v1(1607.43,2029.27)
  Mid-Layer 1 w6: v1(1240,1375) 1240,1681.48 1329.97,1771.45 v1(1426,1771.45)
  Mid-Layer 2 w6: v1(1240,1375) 1310.11,1304.89 U2.M1@1323.35,1304.89 ; v1(1426,1771.45) 1426,1807.87 1451.13,1833 1501.87,1833 1607.43,1938.56 v1(1607.43,2029.27)
IO15: U2.E9 U5.22 | length 563.9
  Top Layer w6: v1(1506.13,1969.91) 1506.13,2004.16 1523.38,2021.41 U5.22@1561.43,2021.41 ; U2.E9@1631.38,1580.48 U2.E9@1638.32,1580.48
  Mid-Layer 4 w6: v1(1506.13,1969.91) 1506.13,1953.87 1579,1881 1579,1771.7 1578.57,1771.28 1578.57,1656 1579.95,1654.63 1579.95,1611.98 1591.08,1600.85 1617.95,1600.85 U2.E9@1638.32,1580.48
IO16: U2.P6 U5.23 | length 1151.3
  Top Layer w6: U2.P6@1520.2,1226.15 1499.83,1246.52 1472.96,1246.52 1461.83,1257.65 1461.83,1312.76 1472.96,1323.89 1531.89,1323.89 1540,1332 1540,1471 1529,1482 1507,1482 1499.83,1489.17 1499.83,1551.17 1490,1561 1390,1561 1383.09,1567.91 1383.09,1848.09 1471,1936 1471,1986 1522.41,2037.41 U5.23@1561.43,2037.41
IO_5: U2.B3
IO_6: U2.C7
IO_7: U2.P7
IO_8: TP3.1 U2.A6 | length 1748.7
  Top Layer w6: U2.A6@1520.2,1737.96 1531,1748.76 1531,1871 v1(1522,1880)
  Mid-Layer 4 w6: TP3.1@290,2535 290,2432 478,2244 695,2244 1025,1914 1025,1890 1060,1855 1497,1855 v1(1522,1880)
IO_9: U2.B11
IO_10: U2.B13
IO_11: U2.P2
IO_12: U2.D5
IO_13: U2.U4
IO_14: U2.M3
IO_15: U2.D9
IO_16: U2.T4
LVDS_CHANNEL_1_N: J1.B1 R20.1 U2.M14 | length 2305
  MidLayer3 w6: U2.M14@1833.69,1308.69 U2.M14@1835.17,1307.21 ; U2.M14@1835.17,1304.89 U2.M14@1835.17,1307.21 ; J1.B1@2715,1295 2579.63,1295 2572.63,1302 2520.21,1302 2515.52,1306.69 2515.52,1364.4 2489.52,1364.4 2489.52,1244.29 2484.84,1239.6 2436.21,1239.6 2431.52,1244.29 2431.52,1364.4 2405.52,1364.4 2405.52,1244.29 2400.84,1239.6 2352.21,1239.6 2347.52,1244.29 2347.52,1364.4 2321.52,1364.4 2321.52,1244.29 2316.84,1239.6 2268.21,1239.6 2263.52,1244.29 2263.52,1364.4 2237.52,1364.4 2237.52,1244.29 2232.84,1239.6 2184.21,1239.6 2179.52,1244.29 2179.52,1364.4 2153.52,1364.4 2153.52,1244.29 2148.84,1239.6 2100.21,1239.6 2095.52,1244.29 2095.52,1364.4 2069.52,1364.4 2069.52,1306.69 2064.84,1302 2016.63,1302 2000.52,1285.89 1945.41,1285.89 1934.28,1297.02 1932.91,1297.02 1921.78,1285.89 1906.04,1285.89 1894.27,1297.65 1894.17,1297.65 1882.41,1285.89 1866.67,1285.89 1859.28,1293.28 1849.1,1293.28 1836.32,1306.05 U2.M14@1835.17,1307.21
  Bottom Layer w6: R20.1@1796,1294.31 1810,1294.31 1820.57,1304.89 U2.M14@1835.17,1304.89
LVDS_CHANNEL_1_P: J1.B2 U2.L13 | length 2301.1
  MidLayer3 w6: U2.L13@1795.8,1344.26 1795.8,1337.77 1808.31,1325.26 1841.67,1325.26 1848.31,1318.61 1861.39,1318.61 1866.67,1323.89 1882.41,1323.89 1889.29,1317 1896.18,1323.89 1924.93,1323.89 1935.17,1313.65 1945.41,1323.89 2003.47,1323.89 2009.36,1318 2053.52,1318 2053.52,1375.71 2058.21,1380.4 2106.84,1380.4 2111.52,1375.71 2111.52,1351 2123.72,1351 2123.72,1325 2111.52,1325 2111.52,1299 2123.72,1299 2123.72,1273 2111.52,1273 2111.52,1255.6 2137.52,1255.6 2137.52,1375.71 2142.21,1380.4 2190.84,1380.4 2195.52,1375.71 2195.52,1336.71 2207.72,1336.71 2207.72,1310.71 2195.52,1310.71 2195.52,1255.6 2221.52,1255.6 2221.52,1375.71 2226.21,1380.4 2274.84,1380.4 2279.52,1375.71 2279.52,1336.71 2291.72,1336.71 2291.72,1310.71 2279.52,1310.71 2279.52,1255.6 2305.52,1255.6 2305.52,1375.71 2310.21,1380.4 2358.84,1380.4 2363.52,1375.71 2363.52,1255.6 2389.52,1255.6 2389.52,1375.71 2394.21,1380.4 2442.84,1380.4 2447.52,1375.71 2447.52,1255.6 2473.52,1255.6 2473.52,1375.71 2478.21,1380.4 2526.84,1380.4 2531.52,1375.71 2531.52,1318 2546,1318 2573,1345 J1.B2@2615,1345
LVDS_CHANNEL_2_N: J1.B3 U2.L15 | length 2462.1
  Top Layer w6: U2.L15@1874.54,1344.26 1885.74,1344.26 1906.11,1323.89 1921.78,1323.89 1933,1312.66 1934.18,1312.66 1945.41,1323.89 1961.15,1323.89 1972.28,1312.76 1972.28,1311.39 1984.78,1323.89 2000.52,1323.89 2008.4,1316 2045.63,1316 2090.51,1271.12 2140.23,1320.84 2146.85,1320.84 2181.24,1286.46 2181.24,1279.83 2131.52,1230.11 2151.63,1210 2183.63,1210 2188.31,1205.31 2188.31,1135 2214.31,1135 2214.31,1280.31 2219,1285 2267.63,1285 2272.31,1280.31 2272.31,1135 2298.31,1135 2298.31,1280.31 2303,1285 2351.63,1285 2356.31,1280.31 2356.31,1135 2382.31,1135 2382.31,1280.31 2387,1285 2435.63,1285 2440.31,1280.31 2440.31,1210 2471,1210 2510,1249 2510,1471.63 2532,1493.63 2532,1582.63 2553.37,1604 2638.63,1604 2680,1562.63 2680,1513.07 2677.47,1510.54 2677.47,1508.84 2667.63,1499 2667.63,1442.37 J1.B3@2715,1395
LVDS_CHANNEL_2_P: J1.B6 R19.2 U2.L14 | length 2584.3
  Top Layer w6: R19.2@1824.54,1344.26 U2.L14@1835.17,1344.26 1849,1344.26 1855.54,1337.72 1855.54,1336.39 1868.04,1323.89 1882.41,1323.89 1893.54,1312.76 1893.54,1298.39 1906.04,1285.89 1929.57,1285.89 1936,1292.31 1942.43,1285.89 1967.91,1285.89 1974.33,1292.31 1978.35,1292.31 1984.78,1285.89 2000.52,1285.89 2014.63,1300 2039,1300 2087.19,1251.81 2093.82,1251.81 2143.54,1301.53 2161.92,1283.14 2112.2,1233.42 2112.2,1226.8 2145,1194 2172.31,1194 2172.31,1123.69 2177,1119 2225.63,1119 2230.31,1123.69 2230.31,1269 2256.31,1269 2256.31,1123.69 2261,1119 2309.63,1119 2314.31,1123.69 2314.31,1269 2340.31,1269 2340.31,1123.69 2345,1119 2393.63,1119 2398.31,1123.69 2398.31,1269 2424.31,1269 2424.31,1198.69 2429,1194 2477.63,1194 2526,1242.37 2526,1268 2560.3,1268 2560.3,1294 2526,1294 2526,1387 2560.3,1387 2560.3,1413 2526,1413 2526,1465 2548,1487 2548,1576 2560,1588 2632,1588 2664,1556 2664,1519.7 2661.47,1517.17 2661.47,1515.47 2648,1502 2627,1502 2615,1514 J1.B6@2615,1545
LVDS_CHANNEL_3_N: J1.B5 R17.1 U2.M17 | length 2198
  Bottom Layer w6: R17.1@1953.28,1304.89 1944.39,1296 1936,1296 1936,1288 1939.64,1284.36 1961.08,1284.36 1971.21,1274.23 1972.89,1274.23 1973.8,1273.32 1973.8,1257.71 1984.84,1246.68 2000.45,1246.68 2005.57,1251.8 2008.37,1249 2147.31,1249 2147.31,1176.99 2152,1172.3 2200.63,1172.3 2205.31,1176.99 2205.31,1325.7 2231.31,1325.7 2231.31,1176.99 2236,1172.3 2284.63,1172.3 2289.31,1176.99 2289.31,1249 2316.63,1249 2351.5,1283.87 2351.5,1290.5 2300.57,1341.42 2318.96,1359.8 2424.12,1254.65 2430.74,1254.65 2465.13,1289.03 2465.13,1295.66 2359.97,1400.81 2378.36,1419.2 2483.51,1314.04 2490.14,1314.04 2524.52,1348.43 2524.52,1355.05 2419.37,1460.21 2434.16,1475 2441.35,1475 2445,1471.35 2519.37,1396.98 ; 2519.37,1396.97 2533.37,1382.97 ; 2533.38,1382.97 2533.82,1382.53 2642.15,1382.53 2678,1418.37 2678,1460 2713,1495 J1.B5@2715,1495
LVDS_CHANNEL_3_P: J1.B4 R17.2 U2.L16 | length 2280
  Bottom Layer w6: R17.2@1917.92,1340.24 1922.56,1340.24 1937.05,1325.76 1959.28,1325.76 1974.04,1310.99 1974.04,1296.62 1986.3,1284.36 2000.45,1284.36 2011.49,1273.32 2011.49,1268.51 2015,1265 2158.63,1265 2163.31,1260.31 2163.31,1188.3 2189.31,1188.3 2189.31,1337.01 2194,1341.7 2242.63,1341.7 2247.31,1337.01 2247.31,1188.3 2273.31,1188.3 2273.31,1260.31 2278,1265 2310,1265 2332.18,1287.18 2281.26,1338.1 2281.26,1344.73 2315.65,1379.12 2322.27,1379.12 2427.43,1273.96 2445.81,1292.34 2426.08,1312.08 2405,1333.15 2397.23,1325.38 2378.84,1343.76 2386.62,1351.54 2368.23,1369.92 2360.46,1362.14 2342.07,1380.53 2349.85,1388.31 2340.66,1397.5 2340.66,1404.13 2375.04,1438.51 2381.67,1438.51 2486.83,1333.36 2505.21,1351.74 2482.79,1374.17 2464.4,1392.55 2456.62,1384.77 2438.24,1403.16 2446.02,1410.94 2427.63,1429.32 2419.85,1421.54 2401.47,1439.93 2409.25,1447.7 2400.05,1456.9 2400.05,1463.52 2426.53,1490 2448.98,1490 2451.4,1487.58 2526,1412.97 2540,1398.97 2635.97,1398.97 2662,1425 2662,1471 2659,1474 2644,1474 J1.B4@2615,1445
LVDS_CHANNEL_4_N: J1.B7 R18.1 U2.M18 | length 2296.4
  Bottom Layer w6: U2.M18@1992.65,1304.89 1992.65,1319.35 2003.3,1330 R18.1@2003.3,1344.31 2020,1344.31 2024,1348.31 2042,1348.31 2086.51,1392.82 2086.51,1399.45 2037.85,1448.11 2056.23,1466.49 2156.86,1365.86 2163.49,1365.86 2197.88,1400.24 2197.88,1406.87 2097.24,1507.5 2115.63,1525.89 2216.26,1425.26 2222.89,1425.26 2257.27,1459.64 2257.27,1466.27 2156.64,1566.9 2175.03,1585.28 2275.66,1484.65 2282.28,1484.65 2316.67,1519.04 2316.67,1525.67 2268.01,1574.32 2284,1590.31 2316,1590.31 2320.69,1595 2320.69,1663.81 2346.69,1663.81 2346.69,1521.5 2351.37,1516.81 2400,1516.81 2404.69,1521.5 2404.69,1663.81 2430.69,1663.81 2430.69,1521.5 2435.37,1516.81 2484,1516.81 2488.69,1521.5 2488.69,1590.31 2545.31,1590.31 2550,1595 J1.B7@2715,1595
LVDS_CHANNEL_4_P: J1.B8 U2.L17 | length 2295.4
  Bottom Layer w6: U2.L17@1953.28,1344.26 1973.33,1364.31 2035.37,1364.31 2067.19,1396.13 2018.53,1444.79 2018.53,1451.42 2052.92,1485.8 2059.55,1485.8 2090.37,1454.98 2098.85,1463.47 2117.24,1445.08 2108.75,1436.6 2127.14,1418.21 2135.62,1426.7 2154.01,1408.31 2145.52,1399.83 2160.18,1385.17 2178.56,1403.56 2077.93,1504.19 2077.93,1510.82 2112.32,1545.2 2118.94,1545.2 2146.52,1517.62 2155.01,1526.11 2173.39,1507.72 2164.9,1499.24 2219.57,1444.57 2237.96,1462.96 2137.33,1563.59 2137.33,1570.21 2171.71,1604.6 2178.34,1604.6 2278.97,1503.97 2297.36,1522.35 2248.7,1571.01 2248.7,1577.64 2277.37,1606.31 2304.69,1606.31 2304.69,1675.13 2309.37,1679.81 2358,1679.81 2362.69,1675.13 2362.69,1532.81 2388.69,1532.81 2388.69,1675.13 2393.37,1679.81 2442,1679.81 2446.69,1675.13 2446.69,1532.81 2472.69,1532.81 2472.69,1601.63 2477.37,1606.31 2538.69,1606.31 2577.37,1645 J1.B8@2615,1645
LVDS_CHANNEL_5_N: J1.C1 R16.2 U2.K18 | length 2307.4
  Top Layer w6: U2.K18@1992.65,1383.63 2002.68,1383.63 R16.2@2003,1383.31 2008.69,1389 2116.94,1389 2121.63,1393.69 2121.63,1472.5 2147.63,1472.5 2147.63,1393.69 2152.31,1389 2227,1389 2254.31,1416.31 2254.31,1422.94 2198.58,1478.67 2216.97,1497.06 2331.74,1382.28 2338.37,1382.28 2372.75,1416.67 2372.75,1423.29 2257.98,1538.07 2276.37,1556.45 2391.14,1441.68 2397.77,1441.68 2432.15,1476.06 2432.15,1482.69 2317.38,1597.46 2335.76,1615.85 2450.54,1501.08 2457.16,1501.08 2491.55,1535.46 2491.55,1542.09 2376.77,1656.86 2395.16,1675.25 2450.89,1619.52 2457.52,1619.52 2488.63,1650.63 2488.63,1796 2537.63,1845 J1.C1@2715,1845
LVDS_CHANNEL_5_P: J1.C2 U2.K17 | length 2295.2
  Top Layer w6: U2.K17@1953.28,1383.63 1957.63,1383.63 1977,1403 2103.63,1403 2105.63,1405 2105.63,1483.81 2110.31,1488.5 2158.94,1488.5 2163.63,1483.81 2163.63,1405 2220.37,1405 2235,1419.63 2179.27,1475.36 2179.27,1481.98 2213.66,1516.37 2220.28,1516.37 2335.06,1401.6 2353.44,1419.98 2238.67,1534.75 2238.67,1541.38 2273.05,1575.77 2279.68,1575.77 2394.45,1460.99 2412.84,1479.38 2298.06,1594.15 2298.06,1600.78 2332.45,1635.16 2339.08,1635.16 2453.85,1520.39 2472.23,1538.77 2357.46,1653.55 2357.46,1660.18 2391.85,1694.56 2398.47,1694.56 2454.2,1638.83 2472.63,1657.25 2472.63,1692 2458.63,1692 2458.63,1718 2472.63,1718 2472.63,1802.63 2565,1895 J1.C2@2615,1895